# Altium PCB PCB1.PcbDoc
Units mm, origin at the board's own origin, x right, y up, seen from the top; angles counter-clockwise.
Board outline 9.99 x 13 mm, 2 copper layers (Top Layer, Bottom Layer); 8 components, 4 nets, 19 pads, 0 vias.
Unrouted connection lines stored in the file: 3.
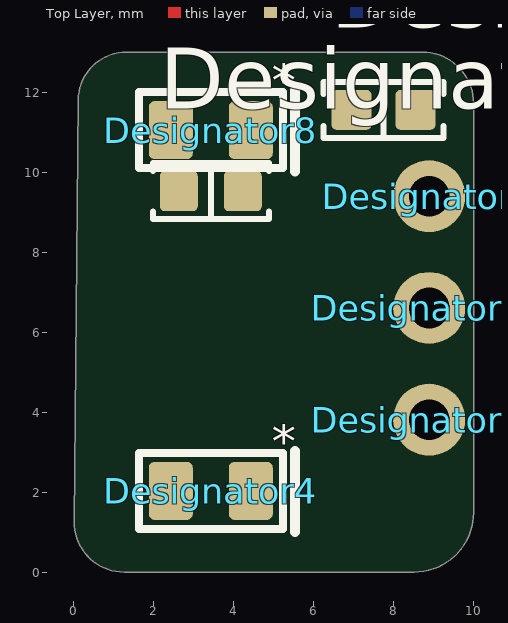
[diagram p0: Top Layer view]
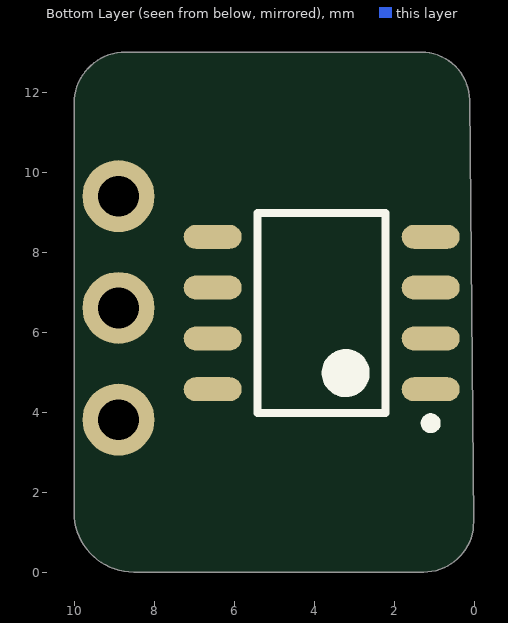
[diagram p1: Bottom Layer view, seen from below]

## Layer stack, top to bottom
Top Solder: solder mask 0.0102, Solder Resist, Dk 3.5
Top Layer: signal copper 0.0356
Dielectric 1: dielectric 0.32, FR-4, Dk 4.8
Bottom Layer: signal copper 0.0356
Bottom Solder: solder mask 0.0102, Solder Resist, Dk 3.5

## Board outline
1.264,0 8.509,0 ccw(c8.509,1.491) 10,1.491 10,11.718 ccw(c8.718,11.718) 8.717,13 1.321,13 ccw(c1.321,11.794) 0.115,11.806 0.012,1.264 ccw(c1.264,1.252)

## Design rules (kind name [scope] priority, off if disabled: settings)
Clearance [All] p1: gap=0.254 ignorepadtopadclearanceinfootprint=FALSE
PolygonConnect [All] p1: connectstyle=Relief reliefconductorwidth=0.254 reliefentries=4 polygonreliefangle="90 Angle" airgapwidth=0.254
RoutingVias [All] p1: holewidth=0.711 width=1.27 viastyle="Through Hole" minholewidth=0.711 minwidth=1.27 maxholewidth=0.711 maxwidth=1.27
SolderMaskExpansion [All] p1: expansion=0.102 istentingtop=FALSE
Width [All] p1: maxlimit=0.254 minlimit=0.254 preferedwidth=0.254
30 further rules are at their usual default settings.

## Components (designator, comment, footprint, x,y, rotation, side; value= is the part's Value field where it differs from the comment)
Designator2 "Comment" 0603_CAP 7.747,11.557 r0 top
Designator4 "Comment" 0805_LED 3.429,2.032 r0 top
Designator6 "Comment" 0603_RES 3.429,9.525 r0 top
Designator8 "Comment" 0805_LED 3.429,11.049 r0 top
Designator9 "Comment" GenericPinHeader(.1in) 8.89,9.398 r0 top
Designator10 "Comment" GenericPinHeader(.1in) 8.89,3.81 r0 top
Designator11 "Comment" GenericPinHeader(.1in) 8.89,6.604 r0 top
? "Comment" SOIC-8 3.81,6.477 r0 bottom

## Footprints (in the part's own frame and the unit in brackets; to place one, negate y for a bottom-side part, rotate by r counter-clockwise, add the part's x,y. Pads: shape width x height; smd on the part's side, far side on the other; paste and mask are expansions set on the pad)
0603_CAP [mm]
  rrect25% 1x1 smd: 1(-0.8,0) 2(0.8,0)
  silkscreen extent -1.5,-0.7 1.5,0.7, body extent -0.8,-0.41 0.8,0.41, height 0.82
0603_RES [mm] "Chip Resistor, 2-Leads, Body 1.60x0.80mm, IPC Medium Density"
  rrect25% 0.95x1 smd: 1(-0.8,0) 2(0.8,0)
  silkscreen extent -1.45,-0.7 1.45,0.7, body extent -0.8,-0.4 0.8,0.4, height 0.45
0805_LED [mm]
  rrect25% 1.1x1.45 smd: 1(-1,0) 2(1,0)
  silkscreen extent -1.8,-1.03 2.1,1, body extent -1.05,-0.67 1.05,0.68, height 0.9
GenericPinHeader(.1in) [mm] "Generic .1in (2.54mm) pin header"
  round 1.8 hole 1.016: 1(0,0)
  body extent -1.27,-1.27 1.27,1.27, height 9.5
SOIC-8 [mm] "SOIC, 8-Leads, Body 4.90x3.90mm, Pitch 1.27mm, IPC Medium Density"
  oval 1.45x0.6 smd: 1(-2.725,1.905) 2(-2.725,0.635) 3(-2.725,-0.635) 4(-2.725,-1.905) 5(2.725,-1.905) 6(2.725,-0.635) 7(2.725,0.635) 8(2.725,1.905)
  silkscreen extent -2.85,-2.5 1.6,2.88, body extent -3,-2.5 3,2.5, height 1.75

## Part data
?: "Generic 555 timer IC"

## Nets (pads, with @x,y where several pads share a name; then routed paths per layer and width w, separated by ;. In a path a pad name is that pad's centre, name@x,y a point inside that pad or via, vN(x,y) a via of type N, cw(c..) or ccw(c..) an arc to the next point about the centre after c; other vN are vias at no path point)
GND: ?.1 Designator10.1
NewNet: 
Power: ?.8 Designator11.1
Signal: ?.4 Designator9.1
pads on no net: ?.2 ?.3 ?.5 ?.6 ?.7 Designator2.1 Designator2.2 Designator4.1 Designator4.2 Designator6.1 Designator6.2 Designator8.1 Designator8.2

## Text inside footprints (layer, text, board x,y; h text height)
Designator4: Top Overlay "*" at 4.953,2.54 h1.52
Designator8: Top Overlay "*" at 4.953,11.557 h1.52